# EAGLE board connection (EAGLE 7.2.1)
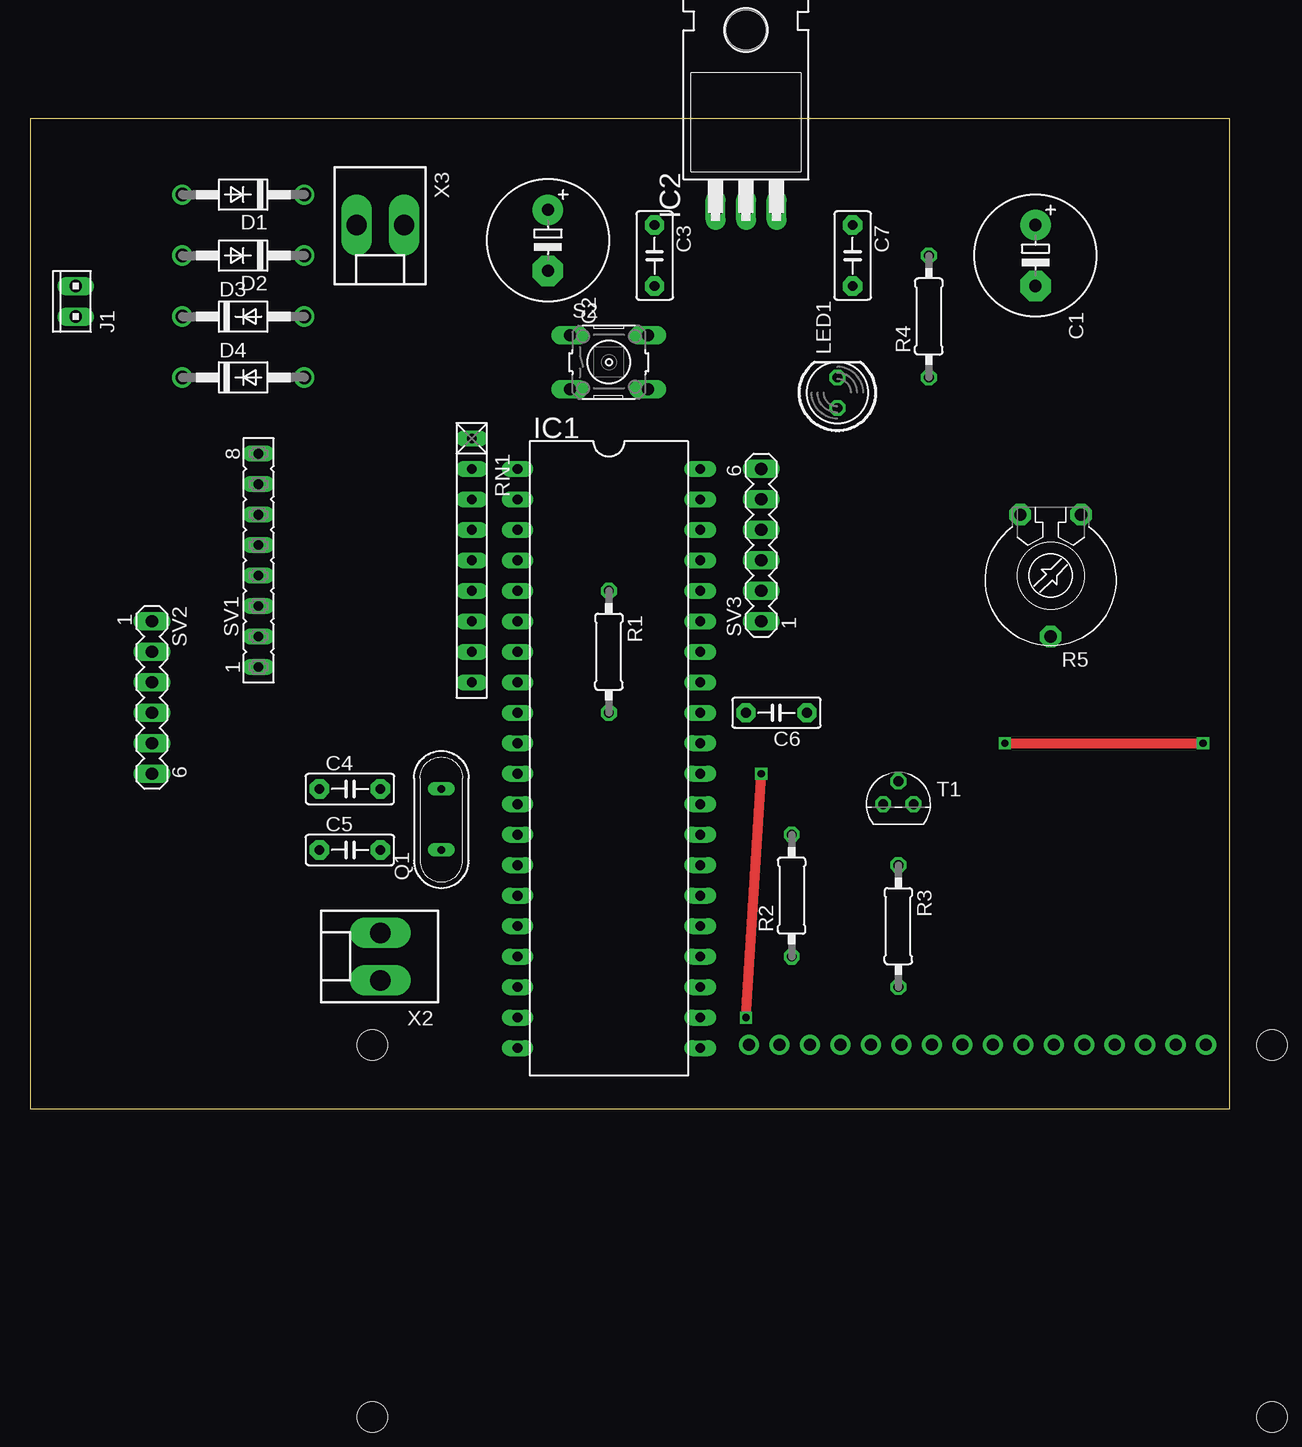
[diagram p0: board, top side]
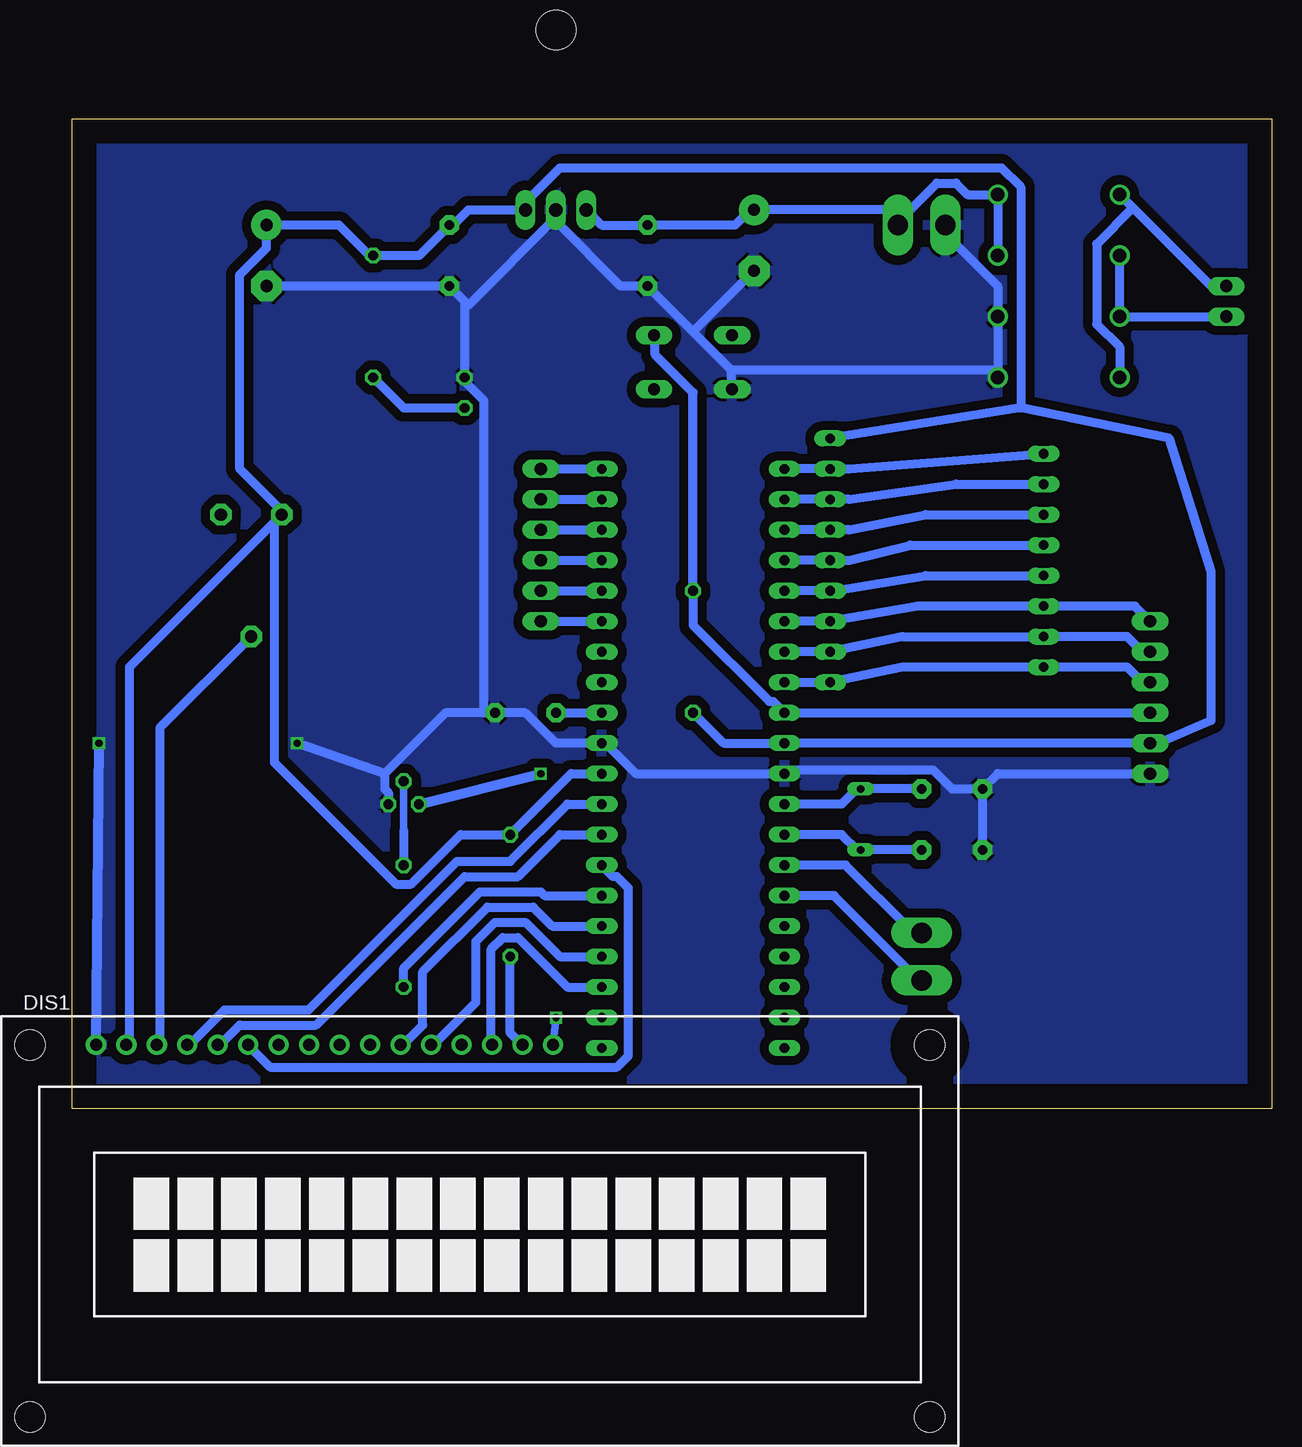
[diagram p1: board, bottom side, seen from below]

Size 100 x 82.54 mm. Coordinates in mm from the lower left corner, seen from the top.
Outline: 0,0 100,0 100,82.54 0,82.54 0,0
Copper layers (1*16): Top 0.035mm / dielectric 1.5mm / Bottom 0.035mm
Design rules "default *": minimum track width 30mil, minimum drill 24mil, track to track 30mil, track to pad 33mil, pad to pad 16mil, via to via 16mil, smd to smd 16mil, copper to edge 80mil, drill to drill 8mil, minimum pad ring 10mil, minimum via ring 8mil, stop-mask expansion 4mil, vias tented up to drill 0mil, thermal gap 10mil

## Footprints (pad centres in the part's own frame; a part is rotated, then mirrored left to right if it is on the bottom)
E5-10,5 = drill 1.016 pad 2.54: + -2.54,0 | drill 1.016 pad 2.54 octagon: - 2.54,0
C5B3 = drill 0.813 pad 1.6 octagon: 1 -2.54,0; 2 2.54,0
C5B2.5 = drill 0.813 pad 1.6 octagon: 1 -2.54,0; 2 2.54,0
DO41-10 = drill 1.118: A 5.08,0; C -5.08,0
TUXGR_16X2_R2 = drill 1 pad 1.676: 1 -32,15.5; 2 -29.46,15.5; 3 -26.92,15.5; 4 -24.38,15.5; 5 -21.84,15.5; 6 -19.3,15.5; 7 -16.76,15.5; 8 -14.22,15.5; 9 -11.68,15.5; 10 -9.14,15.5; 11 -6.6,15.5; 12 -4.06,15.5; 13 -1.52,15.5; 14 1.02,15.5; 15 3.56,15.5; 16 6.1,15.5 | hole 2.5: -37.5,-15.5; 37.5,-15.5; -37.5,15.5; 37.5,15.5
DIL40 = drill 0.813 long: 1 -24.13,-7.62; 2 -21.59,-7.62; 3 -19.05,-7.62; 4 -16.51,-7.62; 5 -13.97,-7.62; 6 -11.43,-7.62; 7 -8.89,-7.62; 8 -6.35,-7.62; 9 -3.81,-7.62; 10 -1.27,-7.62; 11 1.27,-7.62; 12 3.81,-7.62; 13 6.35,-7.62; 14 8.89,-7.62; 15 11.43,-7.62; 16 13.97,-7.62; 17 16.51,-7.62; 18 19.05,-7.62; 19 21.59,-7.62; 20 24.13,-7.62; 21 24.13,7.62; 22 21.59,7.62; 23 19.05,7.62; 24 16.51,7.62; 25 13.97,7.62; 26 11.43,7.62; 27 8.89,7.62; 28 6.35,7.62; 29 3.81,7.62; 30 1.27,7.62; 31 -1.27,7.62; 32 -3.81,7.62; 33 -6.35,7.62; 34 -8.89,7.62; 35 -11.43,7.62; 36 -13.97,7.62; 37 -16.51,7.62; 38 -19.05,7.62; 39 -21.59,7.62; 40 -24.13,7.62
TO220H = drill 1.118 long: 1 -2.54,-10.16; 2 0,-10.16; 3 2.54,-10.16 | hole 3.302: 0,4.826
10X02MTA = drill 1.016 long: 1 1.27,0; 2 -1.27,0
LED5MM = drill 0.813 octagon: A -1.27,0; K 1.27,0
QS = drill 0.61 long: 1 -2.54,0; 2 2.54,0
0207/10 = drill 0.813 octagon: 1 -5.08,0; 2 5.08,0
PT-10 = drill 1.016 pad 1.778 octagon: 1 -2.54,-5.08; 2 2.54,-5.08; 3 0,5.08
RN-9 = drill 0.813 long: 1 -10.16,0; 2 -7.62,0; 3 -5.08,0; 4 -2.54,0; 5 0,0; 6 2.54,0; 7 5.08,0; 8 7.62,0; 9 10.16,0
B3F-10XX = drill 1.016 long: 1 -3.251,2.261; 2 3.251,2.261; 3 -3.251,-2.261; 4 3.251,-2.261
FE08 = drill 0.813 long: 1 -8.89,0; 2 -6.35,0; 3 -3.81,0; 4 -1.27,0; 5 1.27,0; 6 3.81,0; 7 6.35,0; 8 8.89,0
MA06-1 = drill 1.016 long: 1 -6.35,0; 2 -3.81,0; 3 -1.27,0; 4 1.27,0; 5 3.81,0; 6 6.35,0
TO92 = drill 0.813 octagon: 1 1.27,0; 2 0,1.905; 3 -1.27,0
KK-156-2 = drill 1.7 pad 2.184 long: 1 -1.98,0; 2 1.98,0

## Placement (x,y rotation side)
C1  2200u  [E5-10,5]  83.82,71.12 270 top
C2  2200u  [E5-10,5]  43.18,72.39 270 top
C3  0.1u  [C5B3]  52.07,71.12 270 top
C4  22p  [C5B2.5]  26.67,26.67 0 top
C5  22p  [C5B2.5]  26.67,21.59 0 top
C6  0.1u  [C5B2.5]  62.23,33.02 180 top
C7  0.1u  [C5B3]  68.58,71.12 270 top
D1  1N4004  [DO41-10]  17.78,76.2 180 top
D2  1N4004  [DO41-10]  17.78,71.12 180 top
D3  1N4004  [DO41-10]  17.78,66.04 0 top
D4  1N4004  [DO41-10]  17.78,60.96 0 top
DIS1  TUXGR_16X2_R2  [TUXGR_16X2_R2]  66.04,-10.16 0 bottom
IC1  MEGA16-P  [DIL40]  48.26,29.21 270 top
IC2  7805T  [TO220H]  59.69,85.09 0 top
J1  [10X02MTA]  3.81,67.31 90 top
LED1  [LED5MM]  67.31,59.69 90 top
Q1  11.0592 Mz  [QS]  34.29,24.13 90 top
R1  10k  [0207/10]  48.26,38.1 270 top
R2  330  [0207/10]  63.5,17.78 90 top
R3  1k  [0207/10]  72.39,15.24 270 top
R4  330  [0207/10]  74.93,66.04 90 top
R5  [PT-10]  85.09,44.45 180 top
RN1  1k  [RN-9]  36.83,45.72 270 top
S2  [B3F-10XX]  48.26,62.23 0 top
SV1  [FE08]  19.05,45.72 90 top
SV2  [MA06-1]  10.16,34.29 270 top
SV3  [MA06-1]  60.96,46.99 90 top
T1  BC547  [TO92]  72.39,25.4 0 top
X2  [KK-156-2]  29.21,12.7 90 top
X3  [KK-156-2]  29.21,73.66 180 top

## Library data of the parts
C1 C2 R1-R4 = resistor
C3-C7 = capacitor-wima
D1-D4 = diode
DIS1 = display-lcd; OC_FARNELL: unknown; OC_NEWARK: unknown
IC1 = atmel; MPN: ATMEGA16-16PU; OC_FARNELL: 9171142; OC_NEWARK: 01M6885
IC2 = linear
J1 = con-amp
LED1 = led
Q1 = special
R5 = rcl
RN1 = resistor-net; OC_FARNELL: unknown; OC_NEWARK: unknown
S2 = switch-omron; MPN: B3F-1000; OC_FARNELL: 176432; OC_NEWARK: 36M3542
SV1 = con-lsta; OC_FARNELL: unknown; OC_NEWARK: unknown
SV2 SV3 = con-lstb; OC_FARNELL: unknown; OC_NEWARK: unknown
T1 = transistor
X2 X3 = con-molex; OC_FARNELL: unknown; OC_NEWARK: unknown

## Nets
BLIGHT: IC1.26 R3.2
D0: IC1.1 RN1.2 SV1.8
D1: IC1.2 RN1.3 SV1.7
D2: IC1.3 RN1.4 SV1.6
D3: IC1.4 RN1.5 SV1.5
D4: IC1.5 RN1.6 SV1.4
D5: IC1.6 RN1.7 SV1.3 SV2.1
D6: IC1.7 RN1.8 SV1.2 SV2.2
D7: IC1.8 RN1.9 SV1.1 SV2.3
EN: DIS1.6 IC1.27
GND: C1.- C2.- C3.2 C4.1 C5.1 C6.1 C7.2 D3.A D4.A DIS1.1 IC1.11 IC1.31 IC2.2 LED1.K S2.3 SV2.6 T1.1 X3.2
LD0: DIS1.11 IC1.25
LD1: DIS1.12 IC1.24
LD2: DIS1.13
LD3: DIS1.14 IC1.23
LD4: IC1.22
N$1: IC1.35 SV3.1
N$2: C6.2 IC1.32
N$3: C4.2 IC1.12 Q1.2
N$4: C5.2 IC1.13 Q1.1
N$5: D1.A D4.C J1.1
N$6: DIS1.16 T1.3
N$7: D2.A D3.C J1.2
N$8: DIS1.15 R2.1
N$9: R3.1 T1.2
N$10: IC1.15 X2.1
N$11: IC1.14 X2.2
N$12: IC1.36 SV3.2
N$13: LED1.A R4.1
N$14: IC1.37 SV3.3
N$15: IC1.38 SV3.4
N$16: IC1.39 SV3.5
N$17: IC1.40 SV3.6
R: DIS1.4 IC1.29
R/W: DIS1.5 IC1.28
RS: DIS1.3 R5.3
RST: IC1.9 R1.1 S2.2 SV2.4
VCC: C1.+ C7.1 DIS1.2 IC1.10 IC1.30 IC2.3 R1.2 R2.2 R4.2 R5.2 RN1.1 SV2.5
VIN: C2.+ C3.1 D1.C D2.C IC2.1 X3.1

## Tracks (layer width: path | path; a pad name or v marks a point on that pad's centre or on a via)
BLIGHT
  Bottom 0.762: IC1.26 60.64,17.78 60.96,18.1 66.04,18.1 72.39,11.75 R3.2
D0
  Bottom 0.762: SV1.8 35.24,53.34 RN1.2 | RN1.2 IC1.1 | 35.88,53.34 RN1.2
D1
  Bottom 0.762: IC1.2 RN1.3 35.88,50.8 35.24,50.8 26.35,52.07 SV1.7
D2
  Bottom 0.762: IC1.3 RN1.4 35.24,48.26 28.89,49.53 SV1.6
D3
  Bottom 0.762: SV1.5 30.16,46.99 35.24,45.72 RN1.5 IC1.4
D4
  Bottom 0.762: SV1.4 28.89,44.45 36.51,43.18 | IC1.5 RN1.6 36.51,43.18 | 36.2,43.18 36.51,43.18
D5
  Bottom 0.762: IC1.6 RN1.7 29.53,41.91 SV1.3 11.43,41.91 SV2.1
D6
  Bottom 0.762: IC1.7 RN1.8 30.8,39.37 SV1.2 12.06,39.37 10.79,38.1 SV2.2
D7
  Bottom 0.762: IC1.8 RN1.9 30.8,36.83 SV1.1 12.06,36.83 10.79,35.56 SV2.3
EN
  Bottom 0.762: IC1.27 54.93,19.37 54.61,19.37 53.66,18.41 53.66,4.45 54.61,3.49 83.5,3.49 85.09,5.08 DIS1.6
GND  (via drill 0.6)
  Top 0.813: v81.28,30.48 v97.79,30.48
  Bottom 0.762: SV2.6 22.86,27.94 C4.1 | C4.1 C5.1 | T1.1 73.66,26.35 73.98,26.67 73.98,27.94 68.9,33.02 65.72,33.02 | 65.72,33.02 C6.1 62.23,33.02 59.69,30.48 IC1.31 55.56,30.48 53.02,27.94 IC1.11 40.64,28.26 28.26,28.26 26.67,26.67 C4.1 | 67.31,66.99 67.31,67.31 C7.2 C1.- | 67.31,66.99 LED1.K 67.31,60.64 65.72,59.05 65.72,33.02 | 67.31,66.99 66.99,66.99 59.69,74.3 IC2.2 59.69,73.98 54.29,68.58 C3.2 48.26,64.77 | X3.2 26.99,73.66 26.99,72.71 22.86,68.58 D3.A D4.A 23.18,61.59 45.09,61.59 | 45.09,61.59 45.09,60.01 S2.3 | 48.26,64.77 45.09,61.59 | 48.26,64.77 C2.-
  Bottom 0.813: DIS1.1 v97.79,30.48 | 73.98,27.94 v81.28,30.48
  pour Bottom: 0,82.55 100.33,82.55 100.33,0 0,0
LD0
  Bottom 0.762: IC1.25 60.01,15.24 61.59,16.83 65.41,16.83 70.8,11.43 70.8,6.99 72.39,5.4 DIS1.11
LD1
  Bottom 0.762: IC1.24 59.37,12.7 62.23,15.56 64.77,15.56 66.36,13.97 66.36,8.89 69.85,5.4 DIS1.12
LD3
  Bottom 0.762: IC1.23 58.74,10.16 62.87,14.29 64.14,14.29 65.09,13.34 65.09,5.4 DIS1.14
N$1
  Bottom 0.762: SV3.1 IC1.35
N$2
  Bottom 0.762: C6.2 IC1.32
N$3
  Bottom 0.762: C4.2 Q1.2 34.61,26.67 35.88,25.4 IC1.12
N$4
  Bottom 0.762: C5.2 Q1.1 34.61,21.59 35.88,22.86 IC1.13
N$5
  Bottom 0.762: J1.1 5.08,68.58 11.59,75.09 | D1.A 11.59,75.09 | D4.C 12.7,63.5 14.61,65.41 14.61,72.07 11.59,75.09
N$6  (via drill 0.6)
  Top 0.813: v59.69,7.62 v60.96,27.94
  Bottom 0.61: DIS1.16 v59.69,7.62
  Bottom 0.813: T1.3 v60.96,27.94
N$7
  Bottom 0.762: J1.2 D3.C D2.A
N$8
  Bottom 0.762: R2.1 63.5,6.35 62.55,5.4 DIS1.15
N$9
  Bottom 0.61: 72.39,23.18 T1.2
  Bottom 0.762: 72.39,23.18 R3.1 | T1.2 72.07,27.3
N$10
  Bottom 0.762: IC1.15 36.51,17.78 29.21,10.48 X2.1
N$11
  Bottom 0.762: IC1.14 35.56,20.32 30.16,14.92 29.21,14.92 X2.2
N$12
  Bottom 0.762: SV3.2 IC1.36
N$13
  Bottom 0.762: LED1.A 72.39,58.42 R4.1
N$14
  Bottom 0.762: SV3.3 IC1.37
N$15
  Bottom 0.762: SV3.4 IC1.38
N$16
  Bottom 0.762: SV3.5 IC1.39
N$17
  Bottom 0.762: SV3.6 IC1.40
R
  Bottom 0.762: IC1.29 58.74,25.4 63.5,20.64 67.94,20.64 80.33,8.26 87.31,8.26 90.17,5.4 DIS1.4
R/W
  Bottom 0.762: IC1.28 59.37,22.86 62.87,19.37 67.31,19.37 79.69,6.99 86.04,6.99 87.63,5.4 DIS1.5
RS
  Bottom 0.762: R5.3 92.71,31.75 92.71,5.4 DIS1.3
RST
  Bottom 0.762: SV2.4 IC1.9 41.59,33.97 41.91,33.97 48.26,40.32 R1.1 48.26,59.69 51.44,62.87 51.44,64.45 S2.2
VCC
  Bottom 0.762: R1.2 45.72,30.48 IC1.10 SV2.5 9.53,30.48 5.08,32.38 5.08,44.77 8.57,55.88 20.95,58.42 | 20.95,58.42 RN1.1 | IC1.30 58.42,27.94 R2.2 67.63,22.86 71.75,18.73 73.03,18.73 83.19,28.89 83.19,48.58 83.34,48.74 | 83.34,48.74 R5.2 82.55,49.85 86.04,53.34 86.04,69.53 83.82,71.75 C1.+ 77.79,73.66 75.25,71.12 R4.2 71.12,71.12 C7.1 68.26,73.66 66.99,74.93 IC2.3 62.55,75.25 59.37,78.42 22.54,78.42 20.95,76.83 20.95,58.42 | 83.34,48.74 95.25,36.83 95.25,5.4 DIS1.2
VIN
  Bottom 0.762: IC2.1 55.88,73.66 C3.1 44.77,73.66 43.5,74.93 C2.+ 30.48,74.93 X3.1 31.43,73.66 27.94,77.15 26.35,77.15 25.4,76.2 D1.C D2.C